# Altium PCB ESQT-120-XX-XX-D.PCBDOC
Units mil, origin at the board's own origin, x right, y up, seen from the top; angles counter-clockwise.
Board outline 2310 x 710 mil, 2 copper layers (Top, Bottom), stack 12.7 mil thick; 1 components, 0 nets, 40 pads, 0 vias.
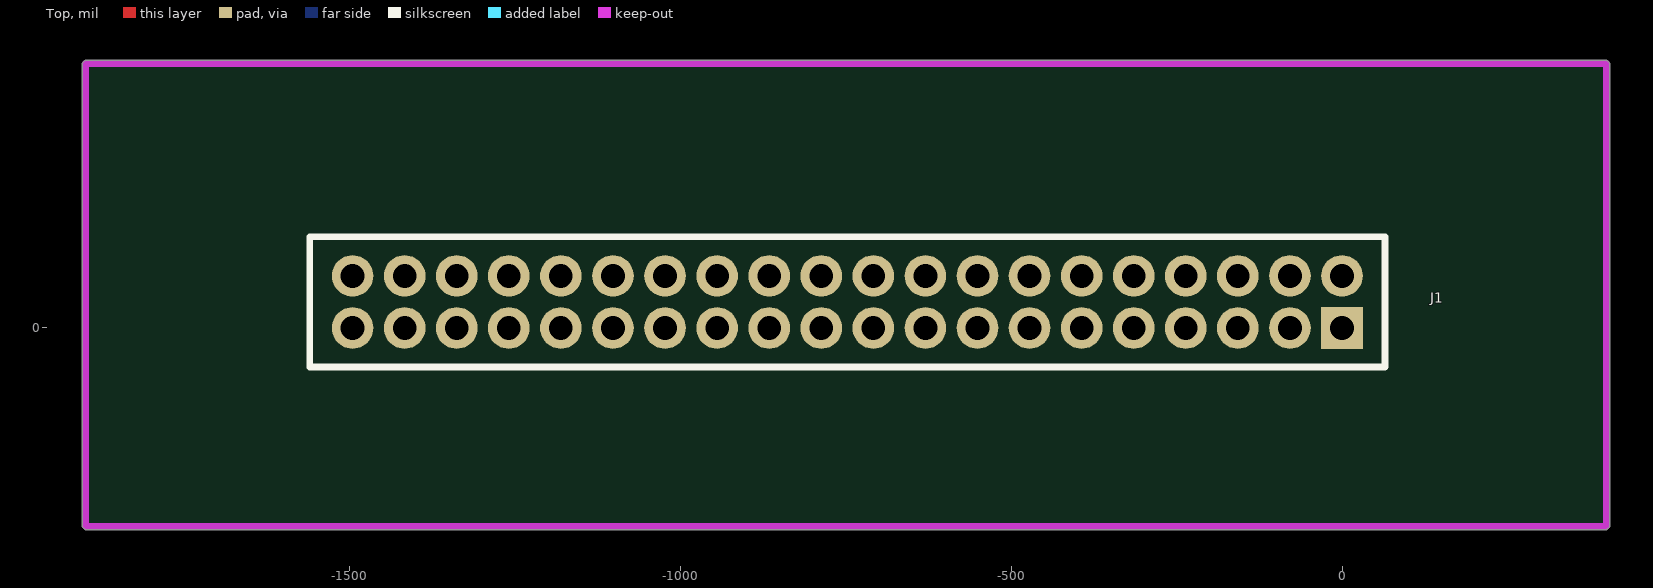
[diagram p0: Top view]
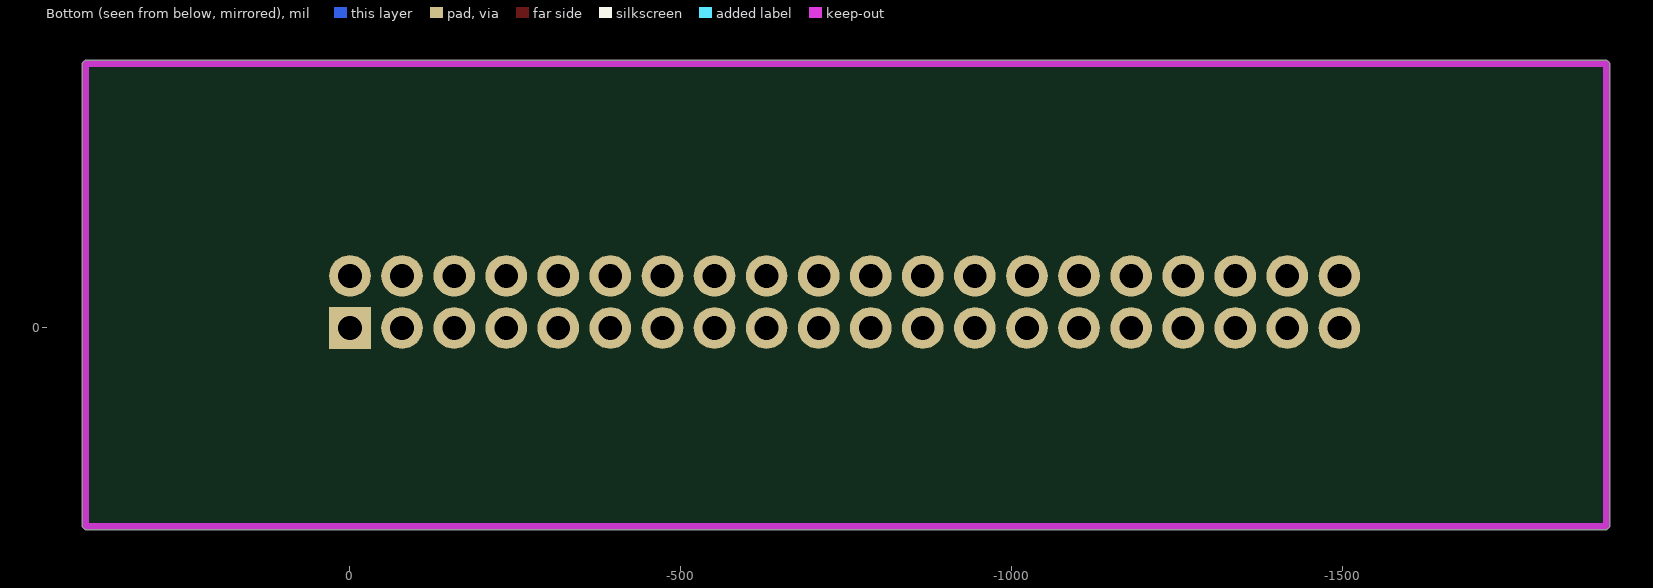
[diagram p1: Bottom view, seen from below]

## Layer stack, top to bottom
Top: signal copper 1.35
Dielectric: dielectric 10, FR-4, Dk 4.3
Bottom: signal copper 1.35

## Board outline
-1905,-300 -1900,-305 400,-305 405,-300 405,400 400,405 -1900,405 -1905,400

## Design rules (kind name [scope] priority, off if disabled: settings)
Clearance "'Default' PADS rule_18" [All] p1: gap=6
Clearance "'Default' PADS rule_15" [IsVia vs IsVia] p2: gap=6
ComponentClearance "'Default' PADS rule_12" [All] p1: gap=6 collisioncheckmode=3 verticalgap=10
FlightTimeFalling "'Default' PADS rule_10" [All] p1: maximum=10,00
FlightTimeRising "'Default' PADS rule_9" [All] p1: maximum=10,00
Length "'Default' PADS rule_5" [All] p1: maxlimit=50000 minlimit=0
MatchedLengths "'Default' PADS rule_11" [InNetClass('All Nets')] p1: tolerance=200 checknetsindiffpair=TRUE checkdiffpairvsdiffpair=TRUE checkothers=TRUE
MaxMinImpedance "'Default' PADS rule_8" [All] p1: minimum=50,00 maximum=150,0
ParallelSegment "'Default' PADS rule_7" [All] p1: limit=1000 gap=200
ParallelSegment "'Default' PADS rule_6" [All] p2: limit=1000 gap=200
PlaneClearance "'Default' PADS rule_14" [All] p1: clearance=6
PlaneConnect "Power Plane Connect Style - pads with no thermal" [(Name='J1-1') Or (Name='J1-2') Or (Name='J1-3') Or (Name='J1-4') Or (Name='J1-5') Or (Name='J1-6') Or (Name='J1-7') Or (Name='J1-8') Or (Name='J1-9') Or (Name='J1-10') Or (Name='J1-11') Or (Name='J1-12') Or (Name='J1-13') Or (Name='J1-14') Or (Name='J1-15') Or (Name='J1-16') Or (Name='J1-17') Or (Name='J1-18') Or (Name='J1-19') Or (Name='J1-20') Or (Name='J1-21') Or (Name='J1-22') Or (Name='J1-23') Or (Name='J1-24') Or (Name='J1-25') Or (Name='J1-26') Or (Name='J1-27') Or (Name='J1-28') Or (Name='J1-29') Or (Name='J1-30') Or (Name='J1-31') Or (Name='J1-32') Or (Name='J1-33') Or (Name='J1-34') Or (Name='J1-35') Or (Name='J1-36') Or (Name='J1-37') Or (Name='J1-38') Or (Name='J1-39') Or (Name='J1-40')] p1: planeconnectstyle=NoConnect reliefexpansion=20 reliefentries=4 reliefconductorwidth=10 reliefairgap=10 // PAD - No Thermal Connect Rule
PlaneConnect "Power Plane Connect Style - from global settings" [All] p2: planeconnectstyle=Relief reliefexpansion=20 reliefentries=2 reliefconductorwidth=15 reliefairgap=10
PolygonConnect [All] p1: connectstyle=Relief reliefconductorwidth=10 reliefentries=4 polygonreliefangle="90 Angle"
RoutingLayers "'Default' PADS rule_3" [All] p1: top layer_v5=TRUE bottom layer_v5=TRUE
RoutingPriority "'Default' PADS rule_2" [All] p1: routingpriority=3
RoutingTopology "'Default' PADS rule" [All] p1: topology=Shortest
RoutingVias "'Default' PADS rule_4" [All] p1: holewidth=37 width=55 viastyle="Through Hole" minholewidth=37 minwidth=55 maxholewidth=37 maxwidth=55
SMDToCorner "'Default' PADS rule_16" [All] p1: distance=60000
SMDToPlane "'Default' PADS rule_17" [All] p1: distance=60000
SolderMaskExpansion [All] p1: expansion=4
TestPointUsage [All] p1: valid=0 allowmultiple=FALSE
Testpoint [All] p1: side=15 testpointundercomponent=TRUE minsize=40 maxsize=100 preferedsize=60 minholesize=0 maxholesize=40 preferedholesize=32 testpointgrid=1 style=1023 order=0123456789
Width "'Default' PADS rule_13" [All] p1: maxlimit=12 minlimit=12 preferedwidth=12
13 further rules are at their usual default settings.

## Components (designator, comment, footprint, x,y, rotation, side; value= is the part's Value field where it differs from the comment)
J1 "ESQT-120-XX-XX-D" ESQT-120-XX-XX-D 0,0 r0 top

## Footprints (in the part's own frame and the unit in brackets; to place one, negate y for a bottom-side part, rotate by r counter-clockwise, add the part's x,y. Pads: shape width x height; smd on the part's side, far side on the other; paste and mask are expansions set on the pad)
ESQT-120-XX-XX-D [mm]
  rect 1.6x1.6 / inner round 1.6 / far side rect 1.6x1.6 hole 0.91 mask+0.075: 1(0,0)
  round 1.6 hole 0.91 mask+0.075: 2(0,2) 3(-2,0) 4(-2,2) 5(-4,0) 6(-4,2) 7(-6,0) 8(-6,2) 9(-8,0) 10(-8,2) 11(-10,0) 12(-10,2) 13(-12,0) 14(-12,2) 15(-14,0) 16(-14,2) 17(-16,0) 18(-16,2) 19(-18,0) 20(-18,2) 21(-20,0) 22(-20,2) 23(-22,0) 24(-22,2) 25(-24,0) 26(-24,2) 27(-26,0) 28(-26,2) 29(-28,0) 30(-28,2) 31(-30,0) 32(-30,2) 33(-32,0) 34(-32,2) 35(-34,0) 36(-34,2) 37(-36,0) 38(-36,2) 39(-38,0) 40(-38,2)
  silkscreen extent -39.65,-1.5 1.65,3.5

## Nets (pads, with @x,y where several pads share a name; then routed paths per layer and width w, separated by ;. In a path a pad name is that pad's centre, name@x,y a point inside that pad or via, vN(x,y) a via of type N, cw(c..) or ccw(c..) an arc to the next point about the centre after c; other vN are vias at no path point)
pads on no net: J1.1 J1.2 J1.3 J1.4 J1.5 J1.6 J1.7 J1.8 J1.9 J1.10 J1.11 J1.12 J1.13 J1.14 J1.15 J1.16 J1.17 J1.18 J1.19 J1.20 J1.21 J1.22 J1.23 J1.24 J1.25 J1.26 J1.27 J1.28 J1.29 J1.30 J1.31 J1.32 J1.33 J1.34 J1.35 J1.36 J1.37 J1.38 J1.39 J1.40

## Keep-outs
Keep-Out Layer:
  lines w10: -1900,-300 -1900,400 400,400 400,-300 -1900,-300